# EAGLE board SensingModulePCB (EAGLE 9.6.2)
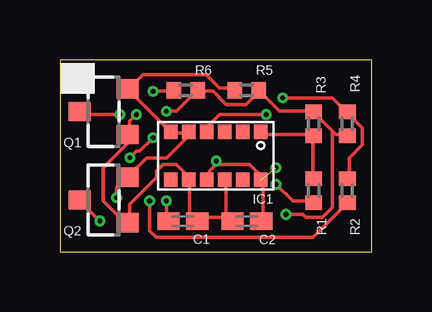
[diagram p0: board, top side]
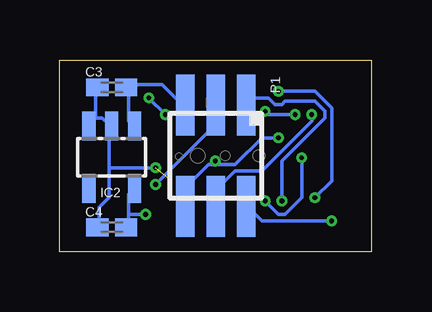
[diagram p1: board, bottom side, seen from below]

Size 13 x 8 mm. Coordinates in mm from the lower left corner, seen from the top.
Outline: 13,8 0,8 0,0 13,0 13,8
Copper layers (1*16): Top 0.035mm / dielectric 1.5mm / Bottom 0.035mm
Design rules "PCB-POOL HighSpec *": minimum track width 6mil, minimum drill 0.2mm, track to track 0.125mm, track to pad 0.125mm, pad to pad 0.125mm, via to via 0.125mm, smd to smd 0.125mm, copper to edge 0.3mm, drill to drill 0.2mm, minimum pad ring 0.2mm, minimum via ring 0.125mm, stop-mask expansion 0.03mm, vias tented up to drill 0mil, thermal gap 0.2mm

## Footprints (pad centres in the part's own frame; a part is rotated, then mirrored left to right if it is on the bottom)
C0402K = smd 0.925 x 0.74: 1 -0.6,0; 2 0.6,0
VL6180X = smd 0.55 x 0.6: 1 -1.875,-1; 2 -1.125,-1; 3 -0.375,-1; 4 0.375,-1; 5 1.125,-1; 6 1.875,-1; 7 1.875,1; 8 1.125,1; 9 0.375,1; 10 -0.375,1; 11 -1.125,1; 12 -1.875,1
SOT25 = smd 0.55 x 1.2: 1 -0.95,-1.3; 2 0,-1.3; 3 0.95,-1.3; 4 0.95,1.3; 5 -0.95,1.3
FTSH-103-04-F-DV = smd 0.762 x 2.54: 1 -1.27,-2.121; 2 -1.27,2.121; 3 0,-2.121; 4 0,2.121; 5 1.27,-2.121; 6 1.27,2.121
SOT23 = smd 0.8 x 0.9: 1 -0.95,-1; 2 0.95,-1; 3 0,1
R0402 = smd 0.6 x 0.7: 1 -0.5,0; 2 0.5,0

## Placement (x,y rotation side)
C1  0.1uF  [C0402K]  5.13,1.27 180 top
C2  4.7uF  [C0402K]  7.79,1.27 0 top
C3  1uF  [C0402K]  10.84,6.86 180 bottom
C4  4.7uF  [C0402K]  10.84,1.01 180 bottom
IC1  VL6180X  [VL6180X]  6.5,4 180 top
IC2  TS5205  [SOT25]  10.84,3.94 180 bottom
P1  FTSH-103-04-F-DV  [FTSH-103-04-F-DV]  6.5,4 180 bottom
Q1  BSS138  [SOT23]  1.82,5.84 90 top
Q2  BSS138  [SOT23]  1.82,2.16 90 top
R1  1k  [R0402]  10.59,2.54 270 top
R2  1k  [R0402]  11.98,2.54 270 top
R3  47k  [R0402]  10.59,5.33 90 top
R4  47k  [R0402]  11.98,5.33 270 top
R5  10k  [R0402]  7.79,6.73 0 top
R6  10k  [R0402]  5.25,6.73 0 top

## Library data of the parts
C1-C4 = rcl; SPICEPREFIX: C
IC1 = st-microelectronics-vl6180x
IC2 = v-reg
P1 = con-samtec2
Q1 Q2 = bss138_10; MF: Fairchild; MPN: BSS138; OC_FARNELL: 9845330; OC_NEWARK: 67R2009
R1-R6 = rcl; SPICEPREFIX: R

## Nets
GND: C1.2 C2.2 C3.2 C4.2 IC1.9 IC1.12 IC2.2 IC2.3 P1.6
GPIO0/CE: P1.1 R2.2
GPIO1: P1.3 R1.2
GPIO1_IN: IC1.1 R1.1 R3.1
GPIO9/CE_IN: IC1.4 R2.1 R4.1
SCL: P1.2 Q2.3
SCL_2_8V: IC1.5 Q2.2 R6.1
SDA: P1.4 Q1.3
SDA_2_8V: IC1.6 Q1.2 R5.1
VCC_2_8V: C1.1 C2.1 C4.1 IC1.8 IC1.10 IC2.5 Q1.1 Q2.1 R3.2 R4.2 R5.2 R6.2
VDD_IN: C3.1 IC2.1 P1.5

## Tracks (layer width: path | path; a pad name or v marks a point on that pad's centre or on a via)
GND  (via drill 0.2)  (1 unrouted)
  Top 0.152: 6.52,3.64 6.24,3.36 6.24,3.08 IC1.9 | 6.52,3.64 7.91,3.64 8.46,3.08 IC1.12 8.46,2.94 8.46,1.28 C2.2 | v4.44,2.11 4.44,1.28 C1.2 | v2.91,3.92 3.19,4.19 3.33,4.19 v3.88,4.75 | v6.52,3.78 6.52,3.64
  Bottom 0.152: 11.51,5.58 11.51,6.83 C3.2 | 11.51,5.58 11.79,5.3 IC2.3 | 10.96,3.5 10.96,5.16 IC2.2 10.96,5.3 11.24,5.58 11.51,5.58 | 10.96,3.5 10.96,2.25 11.37,1.84 11.37,1.14 C4.2 | v4.44,2.11 3.88,1.56 3.61,1.56 2.91,2.25 v2.91,3.92 | v3.88,4.75 4.58,4.75 5.69,3.64 6.52,3.64 | 6.52,3.64 6.8,3.64 7.77,2.67 7.77,1.97 P1.6 | 6.52,3.64 v6.52,3.78 | v9.02,3.5 10.96,3.5
GPIO0/CE  (via drill 0.2)
  Top 0.152: v3.75,2.11 3.75,0.86 4.02,0.59 10.54,0.59 11.93,1.97 R2.2
  Bottom 0.152: v3.75,2.11 3.75,3.78 1.94,5.58 1.94,5.86 2.36,6.27 3.61,6.27 3.75,6.13 4.02,6.13 4.3,6.41 4.86,6.41 5.13,6.13 P1.1
GPIO1  (via drill 0.2)
  Top 0.152: v9.02,2.81 9.71,2.11 10.54,2.11 R1.2
  Bottom 0.152: v9.02,2.81 6.52,5.3 6.52,6 P1.3
GPIO1_IN
  Top 0.152: IC1.1 8.46,4.89 10.54,4.89 R3.1 10.54,4.75 10.54,3.08 R1.1
GPIO9/CE_IN  (via drill 0.2)
  Top 0.152: v8.6,5.72 6.66,5.72 6.24,5.3 6.24,5.03 IC1.4 | v9.29,6.41 11.37,6.41 11.93,5.86 R4.1 12.07,5.72 12.62,5.16 12.62,4.47 12.07,3.92 12.07,3.08 R2.1
  Bottom 0.152: v9.29,6.41 v8.6,5.72
N$1
  Top 0.152: 4.75,4.95 5.25,4.95
SCL  (via drill 0.2)
  Top 0.152: v1.66,1.28 0.83,2.11 Q2.3
  Bottom 0.152: v1.66,1.28 4.58,1.28 5.13,1.84 P1.2
SCL_2_8V  (via drill 0.2)
  Top 0.152: IC1.5 5.27,4.89 5.27,4.75 4.44,3.92 3.61,3.92 2.91,3.22 Q2.2 2.78,3.08 2.36,2.67 v2.36,2.25 | v3.88,6.69 4.72,6.69 R6.1
  Bottom 0.152: v3.88,6.69 2.36,6.69 1.66,6 1.66,2.94 v2.36,2.25
SDA  (via drill 0.2)
  Top 0.152: v2.5,5.72 0.83,5.72 Q1.3
  Bottom 0.152: v2.5,5.72 2.5,5.44 4.58,3.36 5.69,3.36 6.38,2.67 6.38,1.97 P1.4
SDA_2_8V
  Top 0.152: IC1.6 4.58,5.03 2.91,6.69 Q1.2 2.91,6.83 3.47,7.38 6.1,7.38 6.66,6.83 7.21,6.83 R5.1
VCC_2_8V  (via drill 0.2)
  Top 0.152: 6.94,1.42 6.94,2.94 IC1.10 | 6.94,1.42 7.08,1.28 C2.1 6.94,1.42 | 6.94,1.42 5.96,1.42 5.83,1.28 C1.1 5.69,1.28 5.41,1.56 5.41,2.94 IC1.8 5.41,3.08 4.86,3.64 4.3,3.64 4.02,3.36 4.02,3.08 2.91,1.97 2.91,1.28 Q2.1 2.78,1.14 1.8,2.11 1.8,3.5 2.78,4.47 2.78,4.89 Q1.1 2.91,5.03 2.91,5.44 v3.19,5.72 | 11.37,5.03 10.68,5.72 R3.2 10.54,5.86 9.15,5.86 8.32,6.69 | 11.37,5.03 11.51,4.89 11.93,4.89 R4.2 | 8.32,6.69 7.77,6.13 6.94,6.13 6.38,6.69 5.83,6.69 R6.2 5.69,6.69 4.86,5.86 v4.44,5.86 | 8.32,6.69 R5.2 | v9.43,1.56 10.13,1.56 10.26,1.42 10.96,1.42 11.37,1.84 11.37,5.03
  Bottom 0.152: 10.13,1.56 10.13,2.39 9.99,2.53 IC2.5 | 10.13,1.56 10.13,1.14 C4.1 | v9.43,1.56 10.13,1.56 | v3.19,5.72 4.3,5.72 v4.44,5.86
VDD_IN
  Bottom 0.152: IC2.1 9.99,5.3 10.13,5.44 10.13,6.83 C3.1 10.13,6.97 8.74,6.97 7.91,6.13 P1.5